# Altium PCB SpeakEasy_Logic.PcbDoc (part 2 of 2)
Units mil, origin at the board's own origin, x right, y up, seen from the top; angles counter-clockwise.
Board outline 3149.61 x 3149.61 mil, 2 copper layers (Top Layer, Bottom Layer), stack 62.8 mil thick; 87 components, 94 nets, 372 pads, 217 vias.
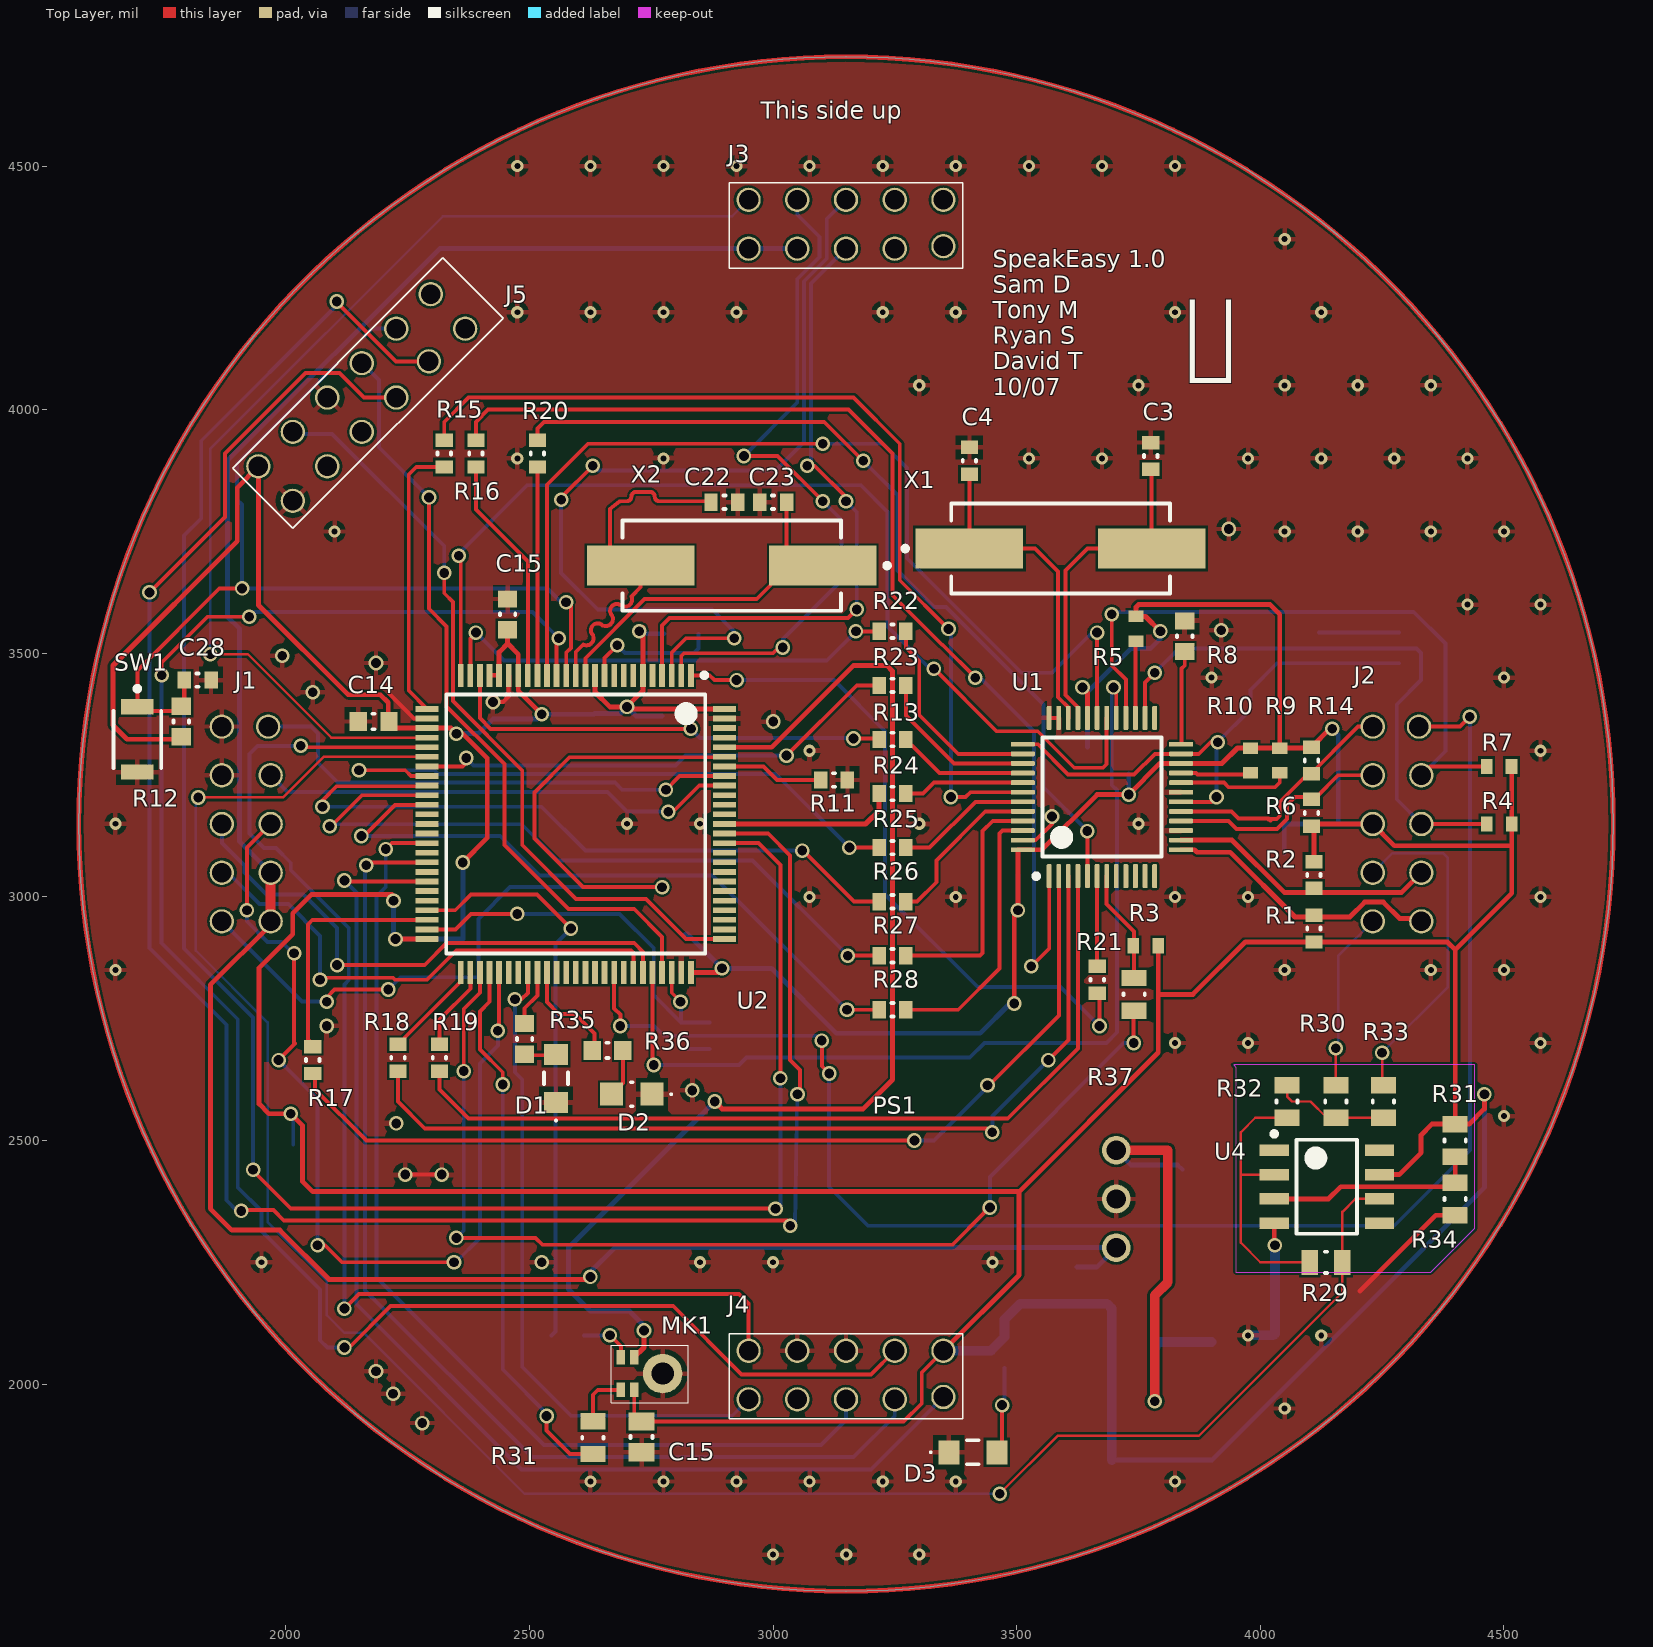
[diagram p0: Top Layer view]

## Via types
v1: diameter 30, hole 20, Top Layer to Bottom Layer, 139 vias
v2: diameter 25, hole 12, Top Layer to Bottom Layer, 78 vias

## Nets (pads, with @x,y where several pads share a name; then routed paths per layer and width w, separated by ;. In a path a pad name is that pad's centre, name@x,y a point inside that pad or via, vN(x,y) a via of type N, cw(c..) or ccw(c..) an arc to the next point about the centre after c; other vN are vias at no path point) (continued)
copper on no net: (continued)
  Top Layer w10: 4724.41,3149.61 ccw(c3149.61,3149.61) 4724.41,3149.61

## Polygon pours and split planes (outlines as drawn)
GND on Bottom Layer "GND_L02_P001" (solid, remove dead copper, pour order 1): 3149.61,1574.8 cw(c3149.61,3149.61) 1574.8,3149.61 cw(c3149.61,3149.61) 3149.61,4724.41 cw(c3149.61,3149.61) 4724.41,3149.61 cw(c3149.61,3149.61)
GND on Top Layer "GND_L01_P000" (solid, remove dead copper, pour order 0): 3149.61,1574.8 cw(c3149.61,3149.61) 1574.8,3149.61 cw(c3149.61,3149.61) 3149.61,4724.41 cw(c3149.61,3149.61) 4724.41,3149.61 cw(c3149.61,3149.61)

## Keep-outs
Keep-Out Layer:
  region: 3945,2655 3950,2650 3950,2230 4350,2230 4440,2320 4440,2655

## Silkscreen, mask and mechanical layers (free items; w line width, h text height)
Top Overlay:
  text "This side up" at 2975,4585 h60
  text "SpeakEasy 1.0 / Sam D / Tony M / Ryan S / David T / 10/07" at 3450.79,4030 h35
  text "" at 3845,3978 h400